# Altium PCB HCHO_Benchmark_B6.PcbDoc
Units mil, origin at the board's own origin, x right, y up, seen from the top; angles counter-clockwise.
Board outline 3464.57 x 2598.43 mil, 2 copper layers (Top Layer, Bottom Layer); 53 components, 45 nets, 171 pads, 57 vias.
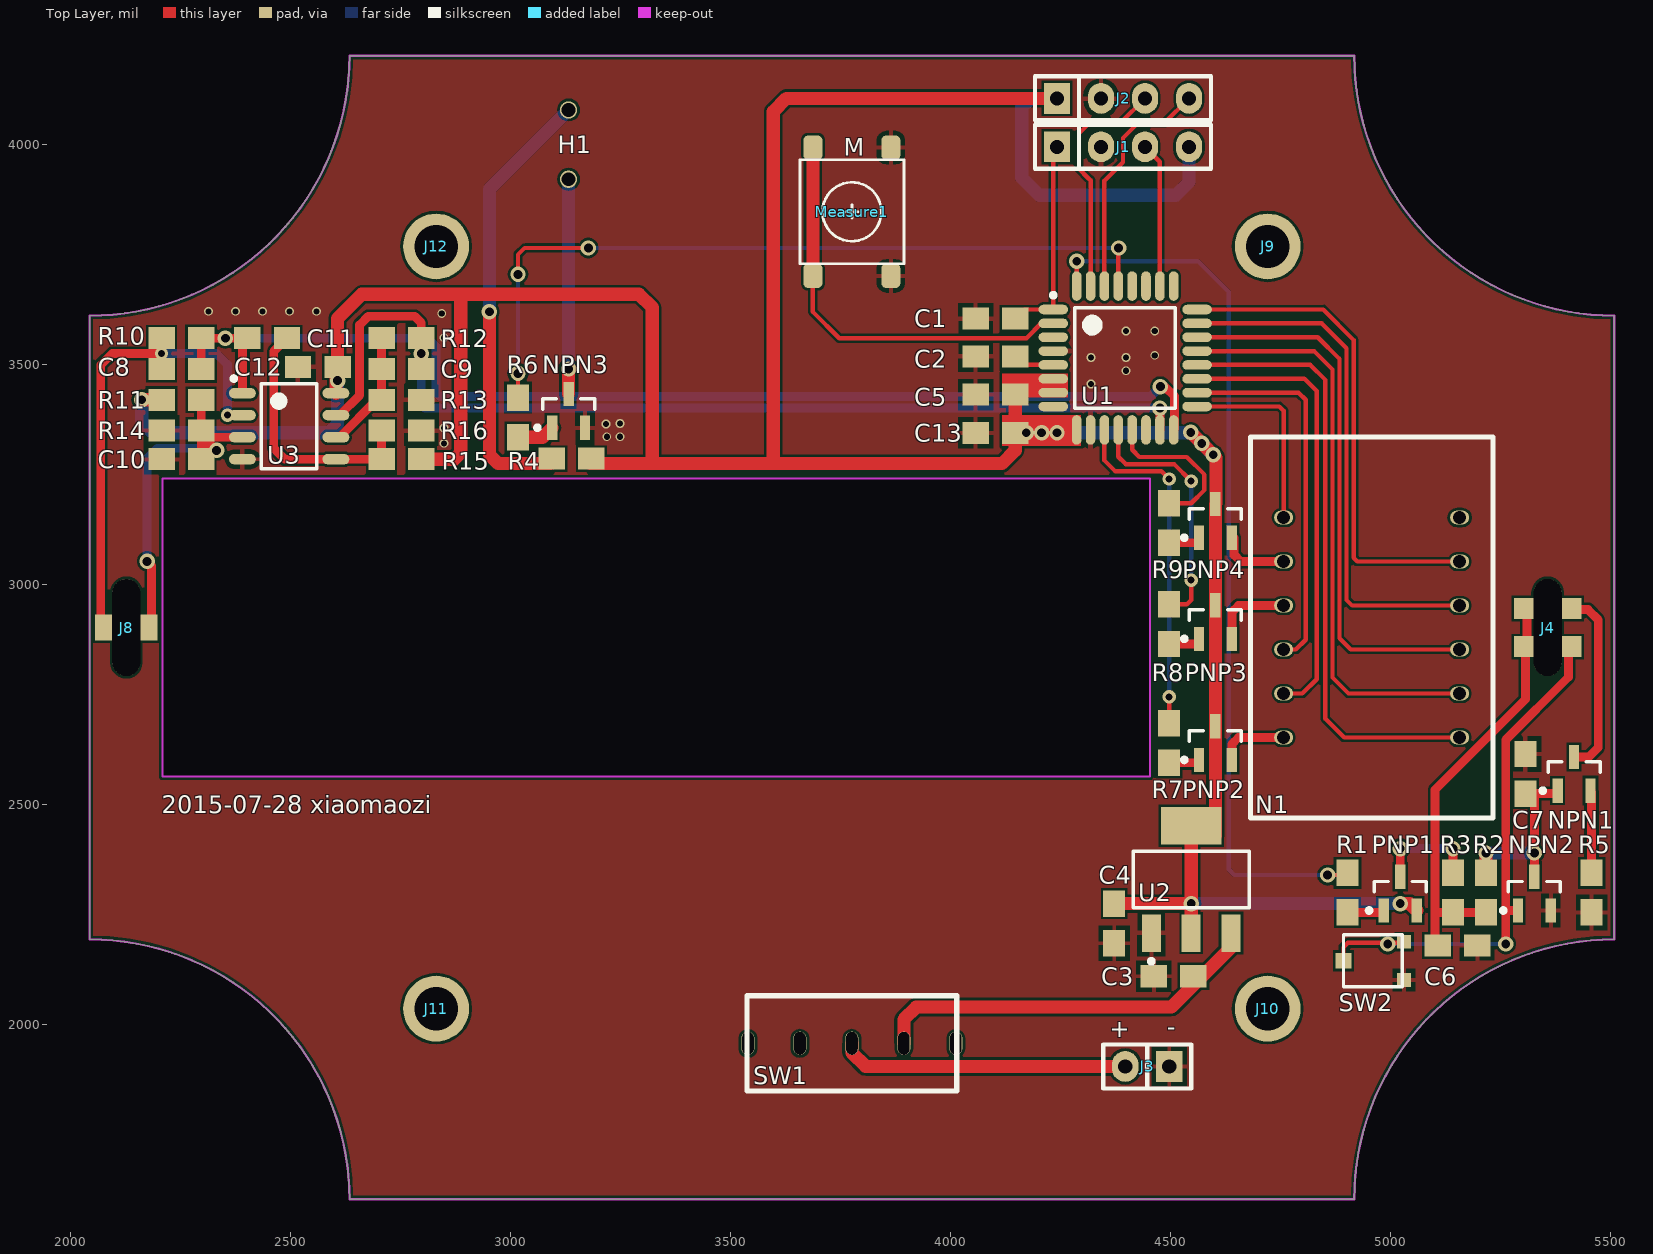
[diagram p0: Top Layer view]
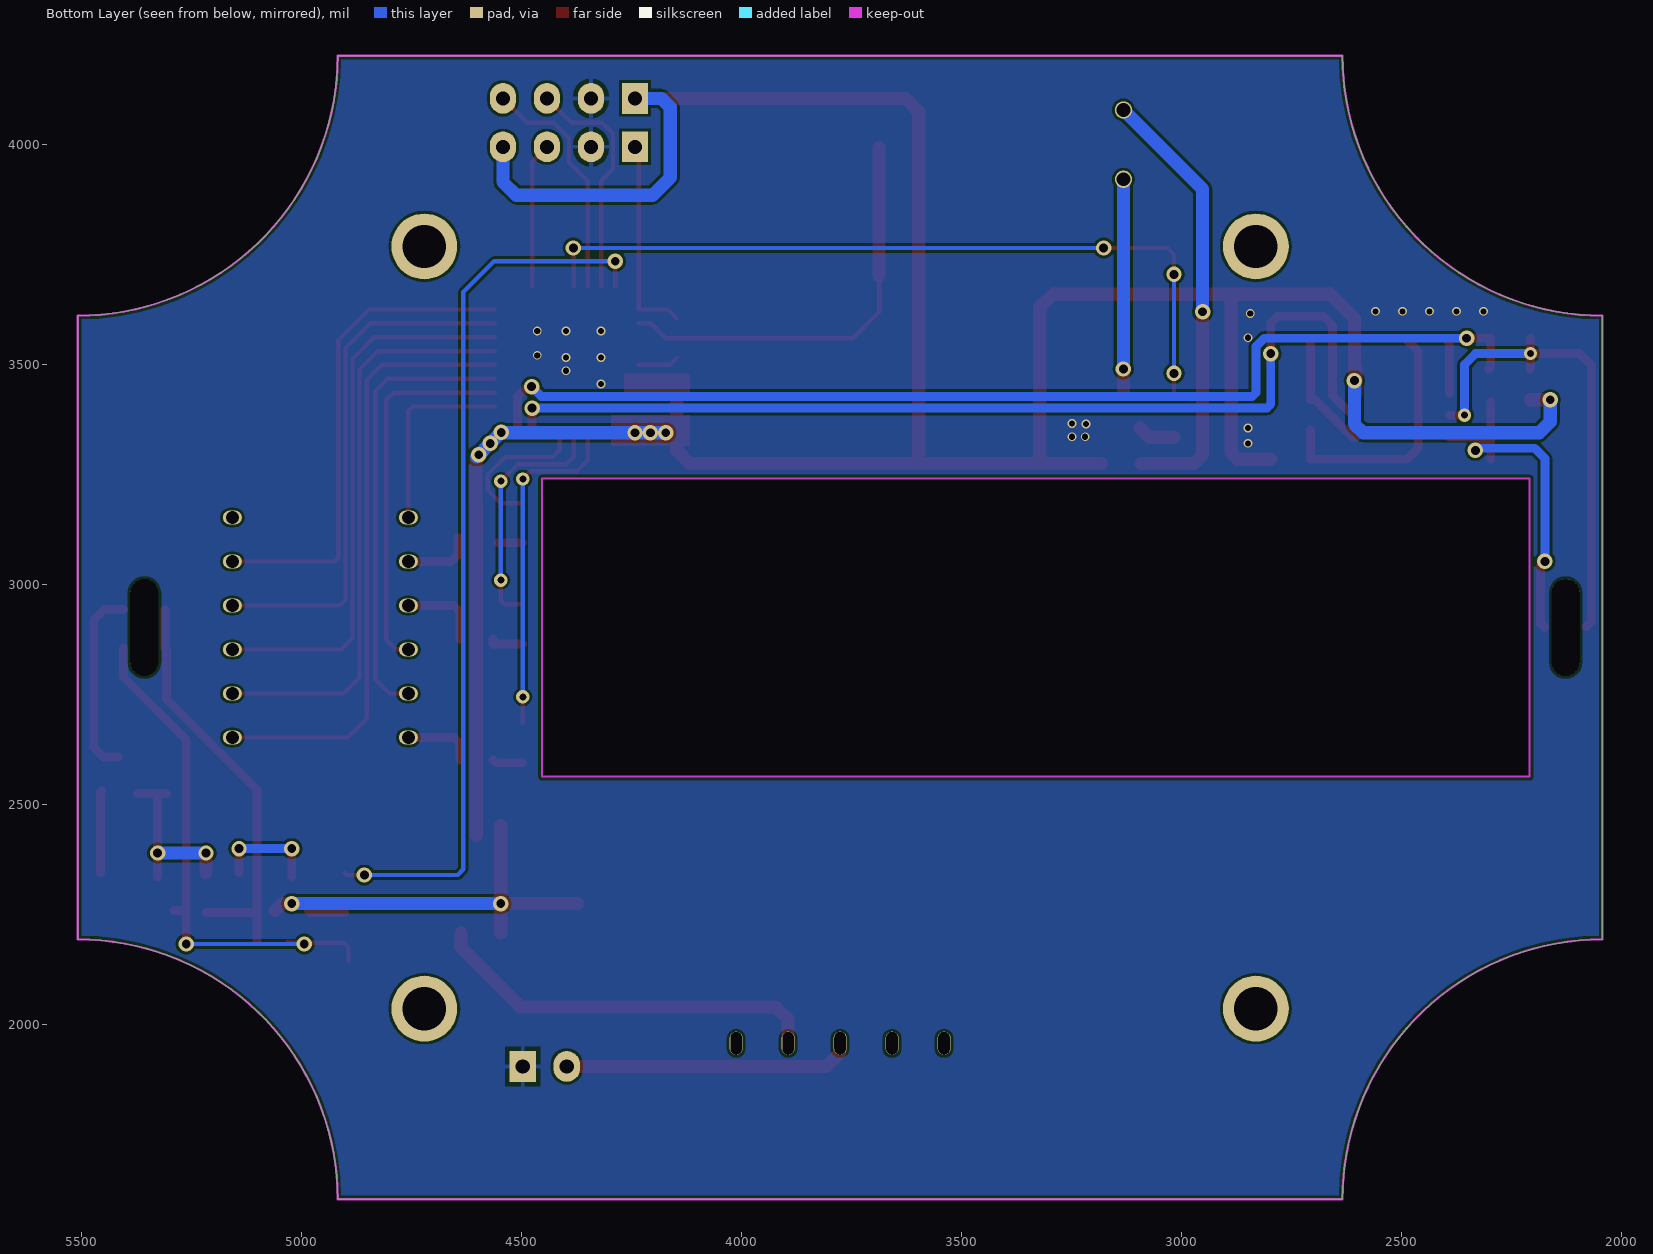
[diagram p1: Bottom Layer view, seen from below]

## Layer stack, top to bottom
Top Layer: signal copper 1.4
Dielectric: dielectric 12.6, FR-4, Dk 4.8
Bottom Layer: signal copper 1.4

## Board outline
2044.65,2192.76 2044.65,3610.08 ccw(c2044.65,4200.63) 2635.2,4200.63 4918.66,4200.63 ccw(c5509.21,4200.63) 5509.21,3610.08 5509.21,2192.76 ccw(c5509.21,1602.2) 4918.66,1602.2 2635.2,1602.2 ccw(c2044.65,1602.2)
cut-out: 2210,3240 4454.1,3240 4454.1,2562.83 2210,2562.83

## Design rules (kind name [scope] priority, off if disabled: settings)
Clearance "6mil Special" [(HasFootprint('FPC 0.5mm 4P') OR HasFootprint('FPC 0.5mm 16P') OR HasFootprint('QFN40P500X500X90_HS-41L'))] p1: gap=6
Clearance "8mil all" [All] p2: gap=6
ComponentClearance [All] p1: gap=-3937.01 collisioncheckmode=3 verticalgap=10 showdistances=FALSE
Height [All] p1: minheight=0 maxheight=2000 prefheight=500
HoleSize [All] p1: absolutevalues=TRUE maxlimit=71537.31 minlimit=0 maxpercent=80.000 minpercent=20.000
HoleToHoleClearance [All] p1: gap=8 allowstackedmicrovias=TRUE
MinimumSolderMaskSliver [All] p1: minsoldermaskwidth=0
PolygonConnect PolygonConnect_1 [isvia] p1: connectstyle=Direct reliefconductorwidth=10 reliefentries=4 polygonreliefangle="90 Angle" airgapwidth=10
PolygonConnect [All] p2: connectstyle=Relief reliefconductorwidth=10 reliefentries=4 polygonreliefangle="90 Angle" airgapwidth=10
RoutingCorners [All] p1: cornerstyle=45-Degree minsetback=10 maxsetback=100
RoutingVias [All] p1: holewidth=14 width=20 viastyle="Through Hole" minholewidth=14 minwidth=20 maxholewidth=100 maxwidth=200
SilkToSilkClearance [All] p1: silktosilkclearance=0
SilkToSolderMaskClearance [IsPad] p1: minsilkscreentomaskgap=0 clearancetoexposedcopper=TRUE
SolderMaskExpansion [All] p1: expansion=4
Width 20mil_Power [(InNet('EP_SUPPLY&VBAT') OR InNet('PSUPPLY') OR InNet('P_3.3V') OR InNet('PSUPPLYBAT') OR InNet('P_3.3V') OR InNet('P_5V'))] p1: maxlimit=39370.08 minlimit=8 preferedwidth=20
Width 8mil_Basic [All] p2: maxlimit=3937.01 minlimit=8 preferedwidth=10
20 further rules are at their usual default settings.

## Components (designator, comment, footprint, x,y, rotation, side; value= is the part's Value field where it differs from the comment)
C1 "1uf" C0805 4103.06,3603.93 r0 top
C2 "1uf" C0805 4103.06,3517.26 r0 top
C3 "10uf" C0805 4508.06,2108.93 r180 top
C4 "10uf" C0805 4373.06,2228.93 r270 top
C5 "10uf" C0805 4103.06,3430.6 r180 top
C6 "1uf" C0805 5153.06,2178.93 r0 top
C7 "1uf" C0805 5308.06,2568.93 r90 top
C8 "6.8pf" C0805 2253.06,3488.93 r180 top
C9 "240pf" C0805 2753.06,3488.93 r180 top
C10 "10uf" C0805 2253.06,3283.93 r180 top
C11 "0.15uf" C0805 2448.06,3558.93 r180 top
C12 "10uf" C0805 2563.06,3493.93 r180 top
C13 "1uf" C0805 4103.06,3343.93 r0 top
H1 "HY09-5T" HY09-5T 3133.06,3998.93 r180 top
J1 "CON4" CON4 4393.06,3993.93 r0 top
J2 "CON4" CON4 4393.06,4103.93 r0 top
J3 "CON2" CON2 4448.06,1903.93 r180 top
J4 "CON2x2_PCB" CON2x2_1.6mm_PCB 5358.06,2901.42 r90 top
J8 "CON1X2_PCB" CON1x2_1.6mm_PCB 2128.06,2901.42 r90 top
J9 "CON1" 2.5MM 4721.81,3767.56 r0 top
J10 "CON1" 2.5MM 4721.81,2035.27 r0 top
J11 "CON1" 2.5MM 2832.05,2035.27 r0 top
J12 "CON1" 2.5MM 2832.05,3767.56 r0 top
Measure1 "Patch_6x6x5" Patch6x6x5 3776.91,3846.29 r90 top
N1 "LG3631BH" LG3631BH 4958.03,2901.42 r90 top
NPN1 "8050" SOT23-3 5418.06,2568.93 r90 top
NPN2 "8050" SOT23-3 5328.06,2296.7 r90 top
NPN3 "8050" SOT23-3 3133.06,3393.93 r90 top
PNP1 "8550" SOT23-3 5023.06,2296.7 r90 top
PNP2 "8550" SOT23-3 4603.06,2638.93 r90 top
PNP3 "8550" SOT23-3 4603.06,2913.93 r90 top
PNP4 "8550" SOT23-3 4603.06,3143.93 r90 top
R1 "1K" R0805 4903.06,2298.93 r90 top
R2 "362" R0805 5218.06,2298.93 r270 top
R3 "1K" R0805 5143.06,2298.93 r270 top
R4 "0" R0805 3140,3285 r0 top
R5 "4R7" R0805 5458.06,2298.93 r90 top
R6 "4.7K" R0805 3018.06,3378.93 r270 top
R7 "1K" R0805 4498.06,2638.93 r90 top
R8 "1K" R0805 4498.06,2908.93 r90 top
R9 "1K" R0805 4498.06,3138.93 r90 top
R10 "3.7K" R0805 2253.06,3558.93 r0 top
R11 "4.7K" R0805 2253.06,3418.93 r180 top
R12 "220K" R0805 2753.06,3558.93 r0 top
R13 "3K" R0805 2753.06,3418.93 r180 top
R14 "1K" R0805 2253.06,3348.93 r0 top
R15 "2M" R0805 2753.06,3283.93 r0 top
R16 "510" R0805 2753.06,3348.93 r180 top
SW1 "SS12F44" SS12F44 3776.91,1956.53 r180 top
SW2 "TMC2K2J" TMC2K2J 4963.06,2143.93 r90 top
U1 "STM8S005K6T6C" STM8S005K6T6C 4398.06,3513.93 r0 top
U2 "1117-3.3" SOT223 4548.06,2328.93 r0 top
U3 "LMV358" LMV358_SOP 2498.06,3358.93 r0 top

## Footprints (in the part's own frame and the unit in brackets; to place one, negate y for a bottom-side part, rotate by r counter-clockwise, add the part's x,y. Pads: shape width x height; smd on the part's side, far side on the other; paste and mask are expansions set on the pad)
2.5MM [mm]
  round 3.8 hole 2.5: 1(0,0)
C0805 [mil]
  rect 60x50 smd: 1(-45,0) 2(45,0)
  body extent -52,-25 55,25, height 31
CON1x2_1.6mm_PCB [mm]
  oval 5.6x1.6 hole 1.6 slot 5.6 at 0 deg unplated: 0(0,0)
  rect 1.5x1.2 smd: 1(0,1.2) 2(0,-1.2)
CON2 [mil]
  rect 60x70 hole 32: 1(-50,0)
  oval 60x70 hole 32: 2(50,0)
  silkscreen extent -100,-50 100,50, body extent -101,-50 100,50, height 295
CON2x2_1.6mm_PCB [mm]
  oval 5.6x1.6 hole 1.6 slot 5.6 at 0 deg unplated: 0(0,0)
  rect 1.2x1.5 smd: 1(-1.1,1.2) 2(-1.1,-1.2) 3(1.1,-1.2) 4(1.1,1.2)
CON4 [mil]
  rect 60x70 hole 32: 1(-150,0)
  oval 60x70 hole 32: 2(-50,0) 3(50,0) 4(150,0)
  silkscreen extent -200,-50 200,50, body extent -201,-50 199,50, height 295
HY09-5T [mm]
  round 1 hole 0.8: 1(0,-2) 2(0,2)
  body extent -4.46,-4.49 4.5,4.49, height 5.5
LG3631BH [mm]
  oval 0.8x1.1 hole 0.75: 1(-6.35,-5.08) 2(-3.81,-5.08) 3(-1.27,-5.08) 4(1.27,-5.08) 5(3.81,-5.08) 6(6.35,-5.08) 7(6.35,5.08) 8(3.81,5.08) 9(1.27,5.08) 10(-1.27,5.08) 11(-3.81,5.08) 12(-6.35,5.08)
  silkscreen extent -11,-7 11,7, body extent -10.98,-6.99 10.99,7, height 7.3
LMV358_SOP [mm] "TSOP, 8-Leads, Body 3.00x3.00mm, Pitch 0.65mm, IPC Medium Density"
  oval 1.55x0.6 smd: 1(-2.7,1.905) 2(-2.7,0.635) 3(-2.7,-0.635) 4(-2.7,-1.905) 5(2.7,-1.905) 6(2.7,-0.635) 7(2.7,0.635) 8(2.7,1.905)
  silkscreen extent -3.32,-2.45 1.6,2.87, body extent -1.95,-2.47 1.93,2.46, height 1.1
Patch6x6x5 [mm]
  rrect50% 1.4x1.1 smd: 1(-3.7,2.25) 2(3.7,2.25) 3(3.7,-2.25) 4(-3.7,-2.25)
  silkscreen extent -3,-3 3,3, body extent -4.13,-3 4.13,3, height 5
R0805 [mil]
  rect 60x50 smd: 1(-45,0) 2(45,0)
  body extent -52,-25 55,25, height 31
SOT23-3 [mm]
  rect 1.4x0.6 smd: 1(-0.975,0.95) 2(-0.975,-0.95) 3(0.975,0)
  silkscreen extent -1.1,-1.5 0.7,1.92, body extent -0.7,-1.5 0.7,1.5, height 1
SOT223 [mm]
  rect 1.1x2.15 smd: 1(-2.3,-3.1) 2(0,-3.1) 3(2.3,-3.1)
  rect 3.5x2.15 smd: 4(0,3.1)
  silkscreen extent -3.35,-4.85 3.35,1.63, body extent -3.3,-3.2 3.3,3.1, height 1.7
SS12F44 [mm]
  oval 0.75x1.35 hole 0.65 slot 1.3 at 90 deg: 1(-6,0) 2(-3,0) 3(0,0) 4(3,0) 5(6,0)
  silkscreen extent -6.05,-2.75 6.05,2.75, body extent -6.05,-2.75 6.05,2.75, height 11
STM8S005K6T6C [mm]
  oval 1.7x0.55 smd: 1(-4.15,2.8) 2(-4.15,2) 3(-4.15,1.2) 4(-4.15,0.4) 5(-4.15,-0.4) 6(-4.15,-1.2) 7(-4.15,-2) 8(-4.15,-2.8) 17(4.15,-2.8) 18(4.15,-2) 19(4.15,-1.2) 20(4.15,-0.4) 21(4.15,0.4) 22(4.15,1.2) 23(4.15,2) 24(4.15,2.8)
  oval 0.55x1.7 smd: 9(-2.8,-4.15) 10(-2,-4.15) 11(-1.2,-4.15) 12(-0.4,-4.15) 13(0.4,-4.15) 14(1.2,-4.15) 15(2,-4.15) 16(2.8,-4.15) 25(2.8,4.15) 26(2,4.15) 27(1.2,4.15) 28(0.4,4.15) 29(-0.4,4.15) 30(-1.2,4.15) 31(-2,4.15) 32(-2.8,4.15)
  silkscreen extent -4.27,-2.9 2.9,3.75, body extent -3.5,-3.5 3.5,3.5, height 1.6
TMC2K2J [mm]
  rect 0.8x0.8 smd: 1(1.1,-1.75) 2(-1.1,-1.75)
  rect 0.9x0.9 smd: 3(0,1.75)
  silkscreen extent -1.5,-1.65 1.5,1.75, body extent -1.5,-1.65 1.49,1.75, height 0.9

## Part data
C1 C2 C3 C4 C5 C6 C7 C8 C9 C10 C11 C12 C13: library part C
NPN1 NPN2 NPN3: library part NPN
PNP1 PNP2 PNP3 PNP4: library part PNP
R1 R2 R3 R5 R7 R8 R9 R10 R11 R12 R13 R14 R15 R16: library part R
R4 R6: library part RES1
U2: library part 1117

## Via types
v1: diameter 35, hole 20, Top Layer to Bottom Layer, 30 vias
v2: diameter 20, hole 14, Top Layer to Bottom Layer, 21 vias
v3: diameter 30, hole 16, Top Layer to Bottom Layer, 6 vias

## Nets (pads, with @x,y where several pads share a name; then routed paths per layer and width w, separated by ;. In a path a pad name is that pad's centre, name@x,y a point inside that pad or via, vN(x,y) a via of type N, cw(c..) or ccw(c..) an arc to the next point about the centre after c; other vN are vias at no path point)
C_LASER: R1.2 U1.32 | length 2020
  Top Layer w10: U1.32 v1(4287.82,3733.7) ; v1(4858.06,2338.93) 4898.06,2338.93 R1.2
  Bottom Layer w10: v1(4287.82,3733.7) 4563.29,3733.7 4633.06,3663.93 4633.06,2351.94 4646.07,2338.93 v1(4858.06,2338.93)
GND: C1.1 C2.1 C3.2 C4.2 C5.2 C6.2 C7.2 C10.2 C12.2 C13.1 J1.2 J2.2 J3.1 Measure1.3 Measure1.4 NPN2.2 NPN3.2 R5.1 R13.1 R14.1 R16.1 SW2.2 U1.4 U1.10 U2.1 U3.4
  other v2: 2850,3320 3220,3335 3250,3335 2850,3355 3218.06,3363.93 3250,3365 4320,3455 4400,3485 4320,3515 4400,3515 4465,3520 2850,3560 4320,3575 4400,3575 4465,3575 2845,3615 2315,3620 2376.25,3620 2437.5,3620 2498.75,3620 2560,3620
LASER_P: C6.1 J4.1 J4.4 R2.2 R3.2 | length 955.7
  Top Layer w20: C6.1@5102.06,2188.93 5102.06,2253.93 ; R2.2 R3.2 5102.06,2253.93 ; J4.1@5310.56,2855.62 5308.06,2853.12 5308.06,2738.93 5102.06,2532.93 5102.06,2253.93 ; J4.1@5310.81,2855.62 J4.4@5310.81,2942.24
N_A: N1.11 U1.19 | length 1026.6
  Top Layer w10: U1.19 4805.3,3466.69 4833.06,3438.93 4833.06,2783.93 4800.54,2751.42 N1.11
N_B: N1.7 U1.17 | length 443.2
  Top Layer w10: U1.17 4748.29,3403.7 4758.03,3393.95 N1.7
N_C: N1.4 U1.23 | length 1197.3
  Top Layer w10: U1.23 4844.32,3592.67 4901.06,3535.93 4901.06,2963.93 4913.57,2951.42 N1.4
N_COM1: R7.2 U1.11 | length 789.1
  Top Layer w10: U1.11 4350.81,3281.18 4375.06,3256.93 4480.06,3256.93 v3(4498.06,3238.93) ; R7.2 v3(4498.06,2743.93)
  Bottom Layer w10: v3(4498.06,2743.93) v3(4498.06,3238.93)
N_COM2: R8.2 U1.12 | length 573.8
  Top Layer w10: U1.12 4382.31,3289.68 4399.06,3272.93 4509.06,3272.93 v3(4548.06,3233.93) ; R8.2 4538.06,2953.93 4548.06,2963.93 v3(4548.06,3008.93)
  Bottom Layer w10: v3(4548.06,3008.93) v3(4548.06,3233.93)
N_COM3: R9.2 U1.13 | length 360.3
  Top Layer w10: U1.13 4413.8,3305.18 4430.06,3288.93 4538.06,3288.93 4578.06,3248.93 4578.06,3213.93 4548.06,3183.93 R9.2
N_D: N1.2 U1.21 | length 1329
  Top Layer w10: U1.21 4827.31,3529.68 4869.06,3487.93 4869.06,2787.93 4905.57,2751.42 N1.2
N_DP: N1.3 U1.22 | length 1262.6
  Top Layer w10: U1.22 4835.81,3561.18 4885.06,3511.93 4885.06,2876.93 4910.57,2851.42 N1.3
N_E: N1.1 U1.20 | length 1398.4
  Top Layer w10: U1.20 4818.8,3498.18 4853.06,3463.93 4853.06,2693.93 4895.57,2651.42 N1.1
N_F: N1.10 U1.18 | length 857.7
  Top Layer w10: U1.18 4791.8,3435.19 4808.06,3418.93 4808.06,2873.93 4785.54,2851.42 N1.10
N_G: N1.5 U1.24 | length 1123.8
  Top Layer w10: U1.24 4847.82,3624.17 4917.06,3554.93 4917.06,3059.93 4925.57,3051.42 N1.5
NBEEP: R6.1 U1.29 | length 1783.1
  Top Layer w10: R6.1 v1(3018.06,3478.93) ; v1(3018.06,3703.93) 3018.06,3748.93 3033.06,3763.93 v1(3178.06,3763.93) ; U1.29 4382.31,3763.18 v1(4383.06,3763.93)
  Bottom Layer w10: v1(3018.06,3478.93) v1(3018.06,3703.93) ; v1(3178.06,3763.93) v1(4383.06,3763.93)
NetC2_2: C2.2 U1.5 | length 93.1
  Top Layer w10: C2.2@4148.06,3513.93 4163.8,3498.18 U1.5
NetC3_1: C3.1 SW1.2 U2.3 | length 898.1
  Top Layer w30: SW1.2 3895.03,2010.9 3923.06,2038.93 4503.06,2038.93 4638.61,2174.48 U2.3
NetC7_1: C7.1 NPN1.1 NPN2.3 R2.1 | length 429.8
  Top Layer w20: NPN2.3 v1(5328.06,2388.93) 5328.06,2523.93 C7.1 NPN1.1@5374.04,2523.93
  Top Layer w30: R2.1 v1(5218.06,2388.93)
  Bottom Layer w30: v1(5218.06,2388.93) v1(5328.06,2388.93)
NetC8_2: C8.2 J8.1 R10.1 U3.2 | length 1161.5
  Top Layer w20: J8.1@2080.81,2903.93 2070,2914.74 2070,3498.12 2095.81,3523.93 v3(2208.06,3523.93) ; R10.1 v3(2208.06,3523.93) ; v3(2358.06,3383.93) U3.2 ; v3(2208.06,3523.93) C8.2 v3(2208.06,3523.93)
  Bottom Layer w20: v3(2208.06,3523.93) 2333.06,3523.93 2358.06,3498.93 v3(2358.06,3383.93)
NetC9_2: C9.2 R12.1 R13.2 U3.6 | length 278.9
  Top Layer w20: U3.6 2612.39,3333.93 2697.39,3418.93 R13.2 C9.2 R12.1
NetC10_1: C10.1 J8.2 R11.1 R14.2 U3.3 | length 829.8
  Top Layer w20: v1(2175.3,3051.69) 2185,3041.99 2185,2910.86 J8.2@2175.55,2901.42 ; C10.1 2298.06,3318.93 ; R11.1@2298.06,3413.93 R14.2 R14.2@2298.06,3333.93 ; v1(2333.06,3303.93) 2318.06,3318.93 2298.06,3318.93 ; U3.3 R14.2@2298.06,3333.93 ; 2298.06,3318.93 R14.2@2298.06,3333.93
  Bottom Layer w20: v1(2175.3,3051.69) 2175.3,3286.18 2198.06,3308.93 2333.06,3308.93 v1(2333.06,3303.93)
NetC11_1: C11.1 R15.1 R16.2 U3.5 | length 582.8
  Top Layer w20: C11.1 2463.06,3528.93 2463.06,3308.93 2488.06,3283.93 U3.5 R15.1 R16.2
NetH1_1: H1.1 R4.1 | length 1006.6
  Top Layer w30: v1(2953.06,3618.93) 2953.06,3293.93 2973.06,3273.93 3023.06,3273.93 R4.1@3093.06,3273.93
  Bottom Layer w30: v1(2953.06,3618.93) 2953.06,3897.67 H1.1
NetH1_2: H1.2 NPN3.3 | length 487.9
  Top Layer w30: NPN3.3 v1(3133.06,3488.93)
  Bottom Layer w30: v1(3133.06,3488.93) H1.2
NetJ3_2: J3.2 SW1.3 | length 655.5
  Top Layer w30: SW1.3 3776.91,1935.07 3808.06,1903.93 J3.2
NetJ4_2: J4.2 NPN2.1 SW2.1 SW2.3 | length 1239.8
  Top Layer w10: SW2.3 4894.16,2175.03 4904.16,2185.03 5029.75,2185.03 SW2.1 v1(4994.75,2182.24)
  Top Layer w20: v1(5263.06,2182.24) 5263.06,2258.32 ; NPN2.1 5263.06,2258.32 ; J4.2@5405.55,2855.62 5405.55,2789.05 5263.06,2646.56 5263.06,2258.32
  Bottom Layer w10: v1(4994.75,2182.24) v1(5263.06,2182.24)
NetJ4_3: J4.3 NPN1.3 | length 431.4
  Top Layer w20: J4.3@5405.3,2942.24 5449.75,2942.24 5473.06,2918.93 5473.06,2628.93 5451.44,2607.32 NPN1.3
NetN1_8: N1.8 PNP4.2 | length 157.9
  Top Layer w20: PNP4.2@4645.46,3105.55 4645.46,3066.53 4660.57,3051.42 N1.8
NetN1_9: N1.9 PNP3.2 | length 184.6
  Top Layer w20: PNP3.2 4640.46,2936.33 4655.54,2951.42 N1.9
NetN1_12: N1.12 PNP2.2 | length 159.6
  Top Layer w20: PNP2.2 4640.46,2636.33 4655.54,2651.42 N1.12
NetNPN1_2: NPN1.2 R5.2 | length 187.7
  Top Layer w20: NPN1.2 5458.06,2527.95 R5.2
NetNPN3_1: NPN3.1 R6.2 | length 86.6
  Top Layer w30: R6.2 3074.04,3333.93 NPN3.1
NetPNP1_1: PNP1.1 R1.1 | length 84.4
  Top Layer w20: R1.1 4981.27,2253.93 PNP1.1
NetPNP1_3: PNP1.3 R3.1 | length 238.8
  Top Layer w20: PNP1.3 v1(5023.06,2398.93) ; R3.1 v1(5143.06,2398.93)
  Bottom Layer w20: v1(5023.06,2398.93) v1(5143.06,2398.93)
NetPNP2_1: PNP2.1 R7.1 | length 70.3
  Top Layer w20: R7.1 4559.04,2593.93 PNP2.1
NetPNP3_1: PNP3.1 R8.1 | length 79.2
  Top Layer w20: R8.1 4565.65,2863.93 PNP3.1
NetPNP4_1: PNP4.1 R9.1 | length 56
  Top Layer w20: R9.1 PNP4.1@4554.04,3093.93
NRESET: C1.2 J1.1 U1.1 | length 475.3
  Top Layer w10: C1.2 4168.29,3624.17 U1.1 J1.1@4234.67,3985.55 ; J1.1@4229.67,3980.55 J1.1@4234.67,3985.55 ; J1.1 J1.1@4234.67,3985.55
NSWIM: J1.3 U1.26 | length 330.6
  Top Layer w10: J1.3 4476.8,3960.19 U1.26
OUT1: C8.1 C11.2 R10.2 U1.16 U3.1 | length 2676.1
  Top Layer w20: C8.1@2303.06,3488.93 2298.06,3493.93 R10.2 v1(2353.06,3558.93) C11.2 2391.76,3547.63 U3.1 ; v1(4478.06,3448.93) 4488.06,3448.93 4510.3,3426.69 4510.3,3352.55 U1.16
  Bottom Layer w20: v1(2353.06,3558.93) 2813.06,3558.93 2831.56,3540.43 2831.56,3435.43 2840.8,3426.19 4455.32,3426.19 v1(4478.06,3448.93)
OUT2: C9.1 R12.2 U1.15 U3.7 | length 2338.5
  Top Layer w20: U3.7 2612.39,3383.93 2658.06,3429.6 2658.06,3588.93 2678.06,3608.93 2783.06,3608.93 2798.06,3593.93 R12.2 v1(2798.06,3523.93) C9.1 ; U1.15 v1(4476.8,3400.19)
  Bottom Layer w20: v1(2798.06,3523.93) 2798.06,3408.93 2806.8,3400.19 v1(4476.8,3400.19)
P_3.3V: C4.1 C5.1 C12.1 C13.2 J1.4 J2.1 PNP1.2 PNP2.3 PNP3.3 PNP4.3 R4.2 R11.2 R15.2 U1.6 U1.7 U1.9 U2.2 U2.4 U3.8 | length 8085.1
  Top Layer w10: C13.2@4148.06,3328.93 C13.2@4163.06,3343.93 ; C5.1@4148.06,3423.93 C5.1@4158.06,3423.93 ; U1.9@4281.21,3343.93 U1.9
  Top Layer w30: v1(2163.06,3418.93) R11.2 ; U3.8 2604.36,3490.23 C12.1 ; v1(2608.06,3462.63) C12.1 ; R15.2 2873.06,3283.93 2888.06,3298.93 2888.06,3658.93 ; R4.2@3183.06,3273.93 3598.06,3273.93 ; 3323.06,3273.93 3323.06,3513.93 3323.06,3628.93 3293.06,3658.93 2888.06,3658.93 ; C5.1@4148.06,3423.93 4148.06,3328.93 4148.06,3303.93 4118.06,3273.93 3598.06,3273.93 ; J2.1 3628.06,4103.93 3598.06,4073.93 3598.06,3273.93 ; C4.1 v1(4548.06,2273.93) ; v1(4547.06,3344.93) v1(4572.06,3319.93) 4604.06,3287.93 4604.06,3183.32 PNP4.3 PNP3.3 PNP2.3 U2.4@4603.06,2428.93 ; U2.2 v1(4548.06,2273.93) ; U2.4 v1(4548.06,2273.93) ; v1(5023.06,2273.93) 5044.84,2273.93 PNP1.2 ; C12.1 2608.06,3603.93 2663.06,3658.93 2888.06,3658.93
  Bottom Layer w30: v1(2163.06,3418.93) 2163.06,3368.93 2188.06,3343.93 2588.06,3343.93 2608.06,3363.93 v1(2608.06,3462.63) ; v1(4173.06,3343.93) v1(4208.06,3343.93) v1(4243.06,3343.93) 4548.06,3343.93 v1(4572.06,3319.93) v1@4603.06,3288.93 ; J2.1 4183.06,4103.93 4163.06,4083.93 4163.06,3923.93 4203.06,3883.93 4513.06,3883.93 4543.06,3913.93 J1.4 ; v1(4548.06,2273.93) v1(5023.06,2273.93)
  other v1: 4598.06,3293.93
TRRIGLE: Measure1.1 Measure1.2 U1.2 | length 958.4
  Top Layer w10: Measure1.1 3688.33,3618.66 3748.06,3558.93 4173.61,3558.93 4207.35,3592.67 U1.2
  Top Layer w30: Measure1.1 Measure1.2
U_RXD: J2.3 U1.31 | length 540.6
  Top Layer w10: U1.31 4319.32,3917.67 4314.32,3922.67 4293.06,3943.93 4293.06,4023.93 4318.06,4048.93 4388.06,4048.93 J2.3
U_TXD: J2.4 U1.30 | length 541.4
  Top Layer w10: U1.30 4350.81,3916.69 4393.06,3958.93 4393.06,4013.93 4428.06,4048.93 4488.06,4048.93 J2.4
pads on no net: J4.0 J8.0 J9.1 J10.1 J11.1 J12.1 N1.6 SW1.1 SW1.4 SW1.5 U1.3 U1.8 U1.14 U1.25 U1.27 U1.28

## Polygon pours and split planes (outlines as drawn)
GND on Bottom Layer "Bottom Layer-No Net" (solid, remove dead copper, pour order 4): 1735,4460 5779.92,4460 5779.92,1395 1729.92,1395
GND on Top Layer "Bottom Layer-No Net" (solid, remove dead copper, pour order 3): 1820,4580 5864.92,4580 5864.92,1515 1814.92,1515

## Keep-outs
Keep-Out Layer:
  lines w5: 2044.65,2192.76 cw(c2044.65,1602.2) 2635.2,1602.2 4918.66,1602.2 cw(c5509.21,1602.2) 5509.21,2192.76 5509.21,3610.08 cw(c5509.21,4200.63) 4918.66,4200.63 2635.2,4200.63 cw(c2044.65,4200.63) 2044.65,3610.08 2044.65,2192.76 ; 2210,2562.83 2210,3240 4454.1,3240 4454.1,2562.83 2210,2562.83

## Other copper
Top Layer:
  rectangle net P_3.3V: 4118.06,3423.93 4268.06,3478.93
  rectangle net P_3.3V: 4118.06,3313.93 4298.06,3383.93

## Silkscreen, mask and mechanical layers (free items; w line width, h text height)
Top Overlay:
  text "M" at 3758.06,3973.93 h40
  text "2015-07-28 xiaomaozi" at 2208.06,2478.93 h40
  text "+" at 4408.06,2003.93 h40 r180
  text "-" at 4513.06,2003.93 h40 r180
Mechanical 1:
  circle w5: c2832.05,2035.27 r49.21
  circle w5: c4721.81,2035.27 r49.21
  circle w5: c2832.05,3767.56 r49.21
  circle w5: c4721.81,3767.56 r49.21
  circle w5: c3776.93,3846.3 r10
  circle w5: c4958.03,2901.42 r50.05
  lines w5: 2091.89,2822.68 2154.88,2822.68 2154.88,2980.16 2091.89,2980.16 2091.89,2822.68
Mechanical 8:
  lines w5: 2684.41,2035.27 2733.62,2035.27 2832.05,2035.27 ; 2684.41,3767.56 2733.62,3767.56 2832.05,3767.56 ; 2832.05,1887.64 2832.05,1936.85 2832.05,2035.27 ; 2832.05,2182.91 2832.05,2133.7 2832.05,2035.27 ; 2832.05,3619.92 2832.05,3669.13 2832.05,3767.56 ; 2832.05,3915.2 2832.05,3865.98 2832.05,3767.56 ; 2979.69,2035.27 2930.47,2035.27 2832.05,2035.27 ; 2979.69,3767.56 2930.47,3767.56 2832.05,3767.56 ; 3678.5,3846.3 3776.93,3846.3 ; 3776.93,3747.87 3776.93,3846.3 ; 3776.93,3944.72 3776.93,3846.3 ; 3875.36,3846.3 3776.93,3846.3 ; 4579.17,3622.56 4628.39,3622.56 ; 4721.81,1887.64 4721.81,1936.85 4721.81,2035.27 4820.24,2035.27 4869.45,2035.27 ; 4809.56,2901.42 4859.61,2901.42 4958.03,2901.42 ; 4958.03,2752.94 4958.03,2802.99 4958.03,2901.42 ; 4958.03,3049.89 4958.03,2999.84 4958.03,2901.42 ; 5106.51,2901.42 5056.46,2901.42 4958.03,2901.42

## Text inside footprints (layer, text, board x,y; h text height)
U3: Mechanical 15 "1" at 2515.77,3352.46 h29.53 r90